# Altium PCB main.PcbDoc
Units mil, origin at the board's own origin, x right, y up, seen from the top; angles counter-clockwise.
Board outline 6000 x 4000 mil, 2 copper layers (Top Layer, Bottom Layer); 11 components, 18 nets, 94 pads, 0 vias.
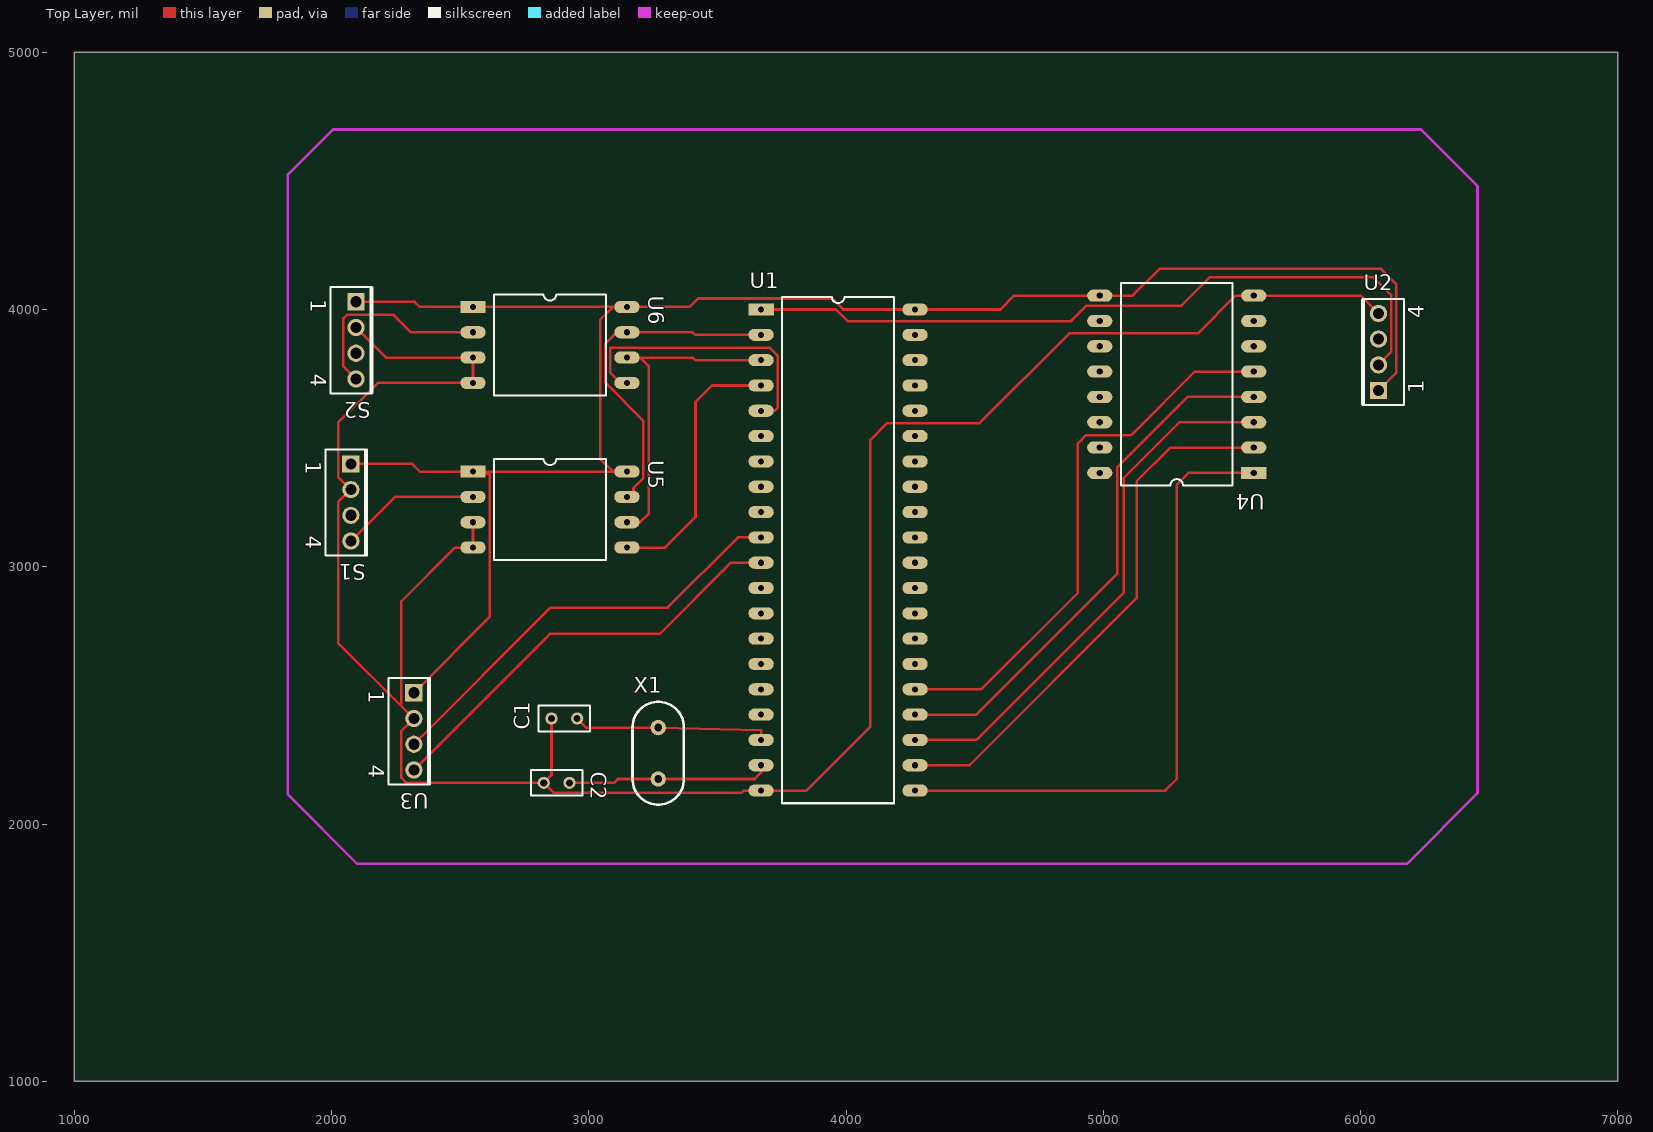
[diagram p0: Top Layer view]
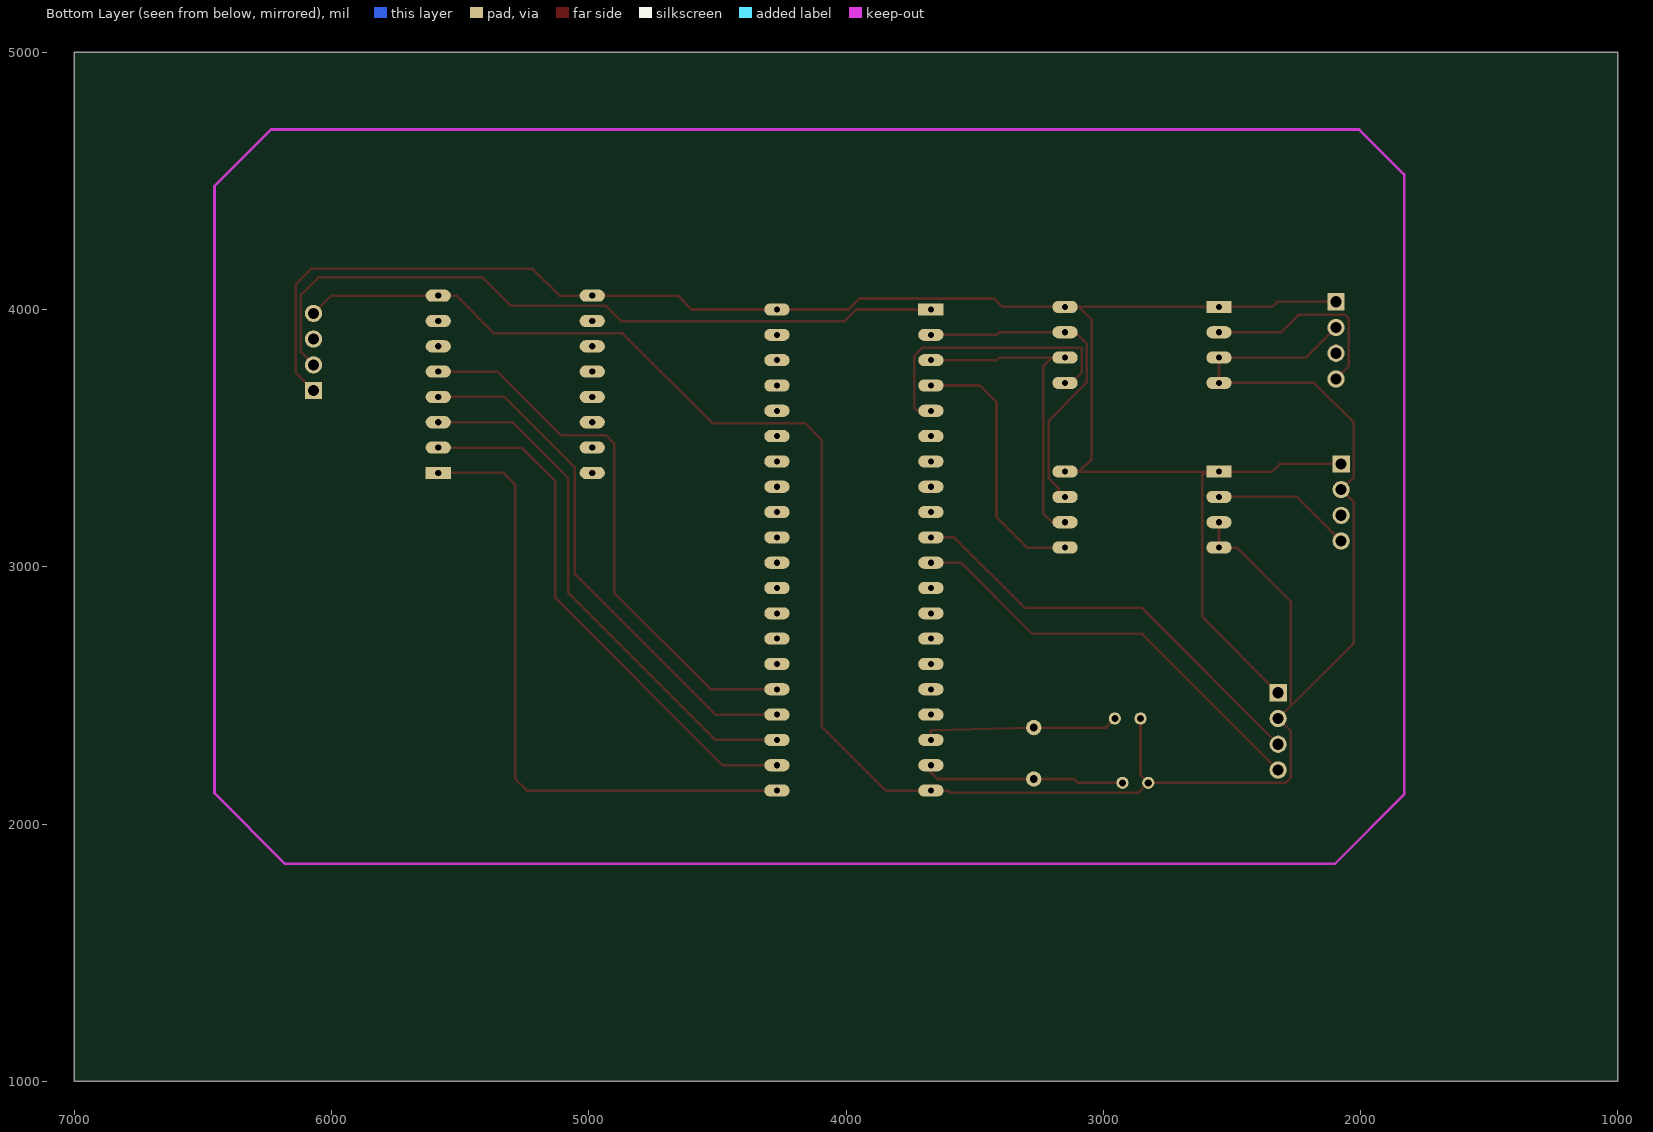
[diagram p1: Bottom Layer view, seen from below]

## Layer stack, top to bottom
Top Layer: signal copper 1.4
Dielectric: dielectric 12.6, FR-4, Dk 4.8
Bottom Layer: signal copper 1.4

## Board outline
1000,1000 7000,1000 7000,5000 1000,5000

## Design rules (kind name [scope] priority, off if disabled: settings)
Clearance [All] p1: gap=10
PolygonConnect [All] p1: connectstyle=Relief reliefconductorwidth=10 reliefentries=4 polygonreliefangle="90 Angle"
RoutingLayers [All] p1: top layer_v5=TRUE bottom layer_v5=FALSE
RoutingVias [All] p1: holewidth=28 width=50 viastyle="Through Hole" minholewidth=28 minwidth=50 maxholewidth=28 maxwidth=50
SilkscreenOverComponentPads [All] p1: minsilkscreentomaskgap=10
SolderMaskExpansion [All] p1: expansion=4
Width [All] p1: maxlimit=10 minlimit=10 preferedwidth=10
26 further rules are at their usual default settings.

## Components (designator, comment, footprint, x,y, rotation, side; value= is the part's Value field where it differs from the comment)
C1 "30pF" RAD-0.1 2905,2410 r180 top
C2 "30pF" RAD-0.1 2875,2160 r0 top
S1 "SIP4" P04A 2075,3250 r270 top
S2 "SIP4" P04A 2095,3880 r270 top
U1 "STC89C52" DIP40 3670,4000 r0 top
U2 "DHT11" P04A 6070,3835 r90 top
U3 "ESP8266 -01" P04A 2320,2360 r270 top
U4 "ULN2003" DIP16 5585,3365 r180 top
U5 "TLC1549" DIP8 2550,3370 r0 top
U6 "TLC1549" DIP8 2550,4010 r0 top
X1 "11.0592MHz" XTAL 3170,2175 r0 top

## Footprints (in the part's own frame and the unit in brackets; to place one, negate y for a bottom-side part, rotate by r counter-clockwise, add the part's x,y. Pads: shape width x height; smd on the part's side, far side on the other; paste and mask are expansions set on the pad)
DIP8 [mm]
  rect 2.5x1.2 hole 0.6: 1(0,0)
  oval 2.5x1.2 hole 0.6: 2(0,-2.5) 3(0,-5) 4(0,-7.5) 5(15.2,-7.5) 6(15.2,-5) 7(15.2,-2.5) 8(15.2,0)
  silkscreen extent 2.08,-8.75 13.11,1.25
DIP16 [mm]
  rect 2.5x1.2 hole 0.6: 1(0,0)
  oval 2.5x1.2 hole 0.6: 2(0,-2.5) 3(0,-5) 4(0,-7.5) 5(0,-10) 6(0,-12.5) 7(0,-15) 8(0,-17.5) 9(15.2,-17.5) 10(15.2,-15) 11(15.2,-12.5) 12(15.2,-10) 13(15.2,-7.5) 14(15.2,-5) 15(15.2,-2.5) 16(15.2,0)
  silkscreen extent 2.08,-18.75 13.11,1.25
DIP40 [mm]
  rect 2.5x1.2 hole 0.6: 1(0,0)
  oval 2.5x1.2 hole 0.6: 2(0,-2.5) 3(0,-5) 4(0,-7.5) 5(0,-10) 6(0,-12.5) 7(0,-15) 8(0,-17.5) 9(0,-20) 10(0,-22.5) 11(0,-25) 12(0,-27.5) 13(0,-30) 14(0,-32.5) 15(0,-35) 16(0,-37.5) 17(0,-40) 18(0,-42.5) 19(0,-45) 20(0,-47.5) 21(15.2,-47.5) 22(15.2,-45) 23(15.2,-42.5) 24(15.2,-40) 25(15.2,-37.5) 26(15.2,-35) 27(15.2,-32.5) 28(15.2,-30) 29(15.2,-27.5) 30(15.2,-25) 31(15.2,-22.5) 32(15.2,-20) 33(15.2,-17.5) 34(15.2,-15) 35(15.2,-12.5) 36(15.2,-10) 37(15.2,-7.5) 38(15.2,-5) 39(15.2,-2.5) 40(15.2,0)
  silkscreen extent 2.08,-48.75 13.11,1.25
P04A [mm] "TO, Thru-Hole, Vertical, Heatsink Mounted; 4 In-Line Leads; Pitch 2.54 mm"
  rect 1.7x1.7 hole 1.1: 1(-3.81,0)
  round 1.7 hole 1.1: 2(-1.27,0) 3(1.27,0) 4(3.81,0)
  silkscreen extent -5.25,-2.5 5.25,1.71
RAD-0.1 [mm] "Radial Cap, Thru-Hole; 2 Leads; 0.1 in Pin Spacin"
  round 1.2 hole 0.7: 1(-1.27,0) 2(1.27,0)
  silkscreen extent -2.54,-1.27 2.54,1.27
XTAL [mil]
  round 60 hole 30: 1(100,200) 2(100,0)
  silkscreen extent 0,-100 200,300

## Part data
C1 C2: library part CAP
U1: library part 89C5
X1: library part CRYSTA

## Nets (pads, with @x,y where several pads share a name; then routed paths per layer and width w, separated by ;. In a path a pad name is that pad's centre, name@x,y a point inside that pad or via, vN(x,y) a via of type N, cw(c..) or ccw(c..) an arc to the next point about the centre after c; other vN are vias at no path point)
GND: C1.2 C2.1 S1.2 S2.2 U1.20 U2.4 U3.2 U4.8 U5.3 U5.4 U6.3 U6.4 | length 9191
  Top Layer w10: S2.2 2211.85,3813.15 U6.3 U6.4 2180.72,3714.72 2026,3560 2026,3349 S1.2 2026,3251 2026,2704 2271,2459 ; U5.3 U5.4 2480,3074.72 2271,2865.72 2271,2459 ; C1.2 2855,2190 C2.1 ; U2.4 6001.02,4053.98 U4.8 5514.98,4053.98 5368,3907 4868,3907 4519,3558 4160,3558 4095,3493 4095,2378.92 3846,2129.92 U1.20 3602.92,2129.92 3594,2121 2864,2121 C2.1 ; 2271,2459 U3.2 2271,2361 2271,2180 2291,2160 C2.1
NetC1_1: C1.1 U1.18 X1.1 | length 767.9
  Top Layer w10: C1.1 2990,2375 X1.1 3670,2365 U1.18
NetC2_2: C2.2 U1.19 X1.2 | length 789.9
  Top Layer w10: C2.2 3098,2160 3113,2175 X1.2 3645,2175 3670,2200 U1.19
NetS1_4: S1.4 U5.2 | length 546.1
  Top Layer w10: S1.4 2246.57,3271.57 U5.2
NetS2_4: S2.4 U6.2 | length 793
  Top Layer w10: S2.4 2046,3779 2046,3965 2060,3979 2241,3979 2308.43,3911.57 U6.2
NetU1_1: U1.1 U2.2 | length 2858.5
  Top Layer w10: U1.1 3961,4000 4006,3955 4875,3955 4935,4015 5304,4015 5414,4125 6051,4125 6119,4057 6119,3834 U2.2
NetU1_2: U1.2 U5.7 U6.7 | length 1327.3
  Top Layer w10: U5.7 3174,3271.57 3174,3306 3212.64,3344.64 3212.64,3567.36 3064.21,3715.79 3064.21,3867.79 3108,3911.57 U6.7 3404,3911.57 3414,3901.57 U1.2
NetU1_3: U1.3 U5.6 U6.6 | length 1244.3
  Top Layer w10: U5.6 3200,3173.15 3232.64,3205.79 3232.64,3780.51 3200,3813.15 ; U6.6 3200,3813.15 ; U1.3 3414,3803.15 3404,3813.15 3200,3813.15
NetU1_4: U1.4 U5.5 | length 1044.5
  Top Layer w10: U5.5 3297,3074.72 3415,3192.72 3415,3640 3479.72,3704.72 U1.4
NetU1_5: U1.5 U6.5 | length 1112.9
  Top Layer w10: U6.5 3123,3714.72 3084.21,3753.51 3084.21,3851 3085.21,3852 3703,3852 3735,3820 3735,3620 3721.3,3606.3 U1.5
NetU1_10: U1.10 U3.3 | length 1683.1
  Top Layer w10: U3.3 2851,2841 3306.83,2841 3580,3114.17 U1.10
NetU1_11: U1.11 U3.4 | length 1683.8
  Top Layer w10: U3.4 2849,2739 3276,2739 3552.75,3015.75 U1.11
NetU1_21: U1.21 U4.1 | length 2498.3
  Top Layer w10: U1.21 5240,2129.92 5286,2175.92 5286,3320 5331,3365 U4.1
NetU1_22: U1.22 U4.2 | length 2094.4
  Top Layer w10: U1.22 4480.35,2228.35 5130,2878 5130,3332.43 5261,3463.43 U4.2
NetU1_23: U1.23 U4.3 | length 2089.6
  Top Layer w10: U1.23 4507,2326.77 5080,2899.77 5080,3346 5295.85,3561.85 U4.3
NetU1_24: U1.24 U4.4 | length 2070.6
  Top Layer w10: U1.24 4507,2425.2 5055,2973.2 5055,3387 5328.28,3660.28 U4.4
NetU1_25: U1.25 U4.5 | length 2168.5
  Top Layer w10: U1.25 4525.62,2523.62 4901,2899 4901,3480 4933,3512 5109,3512 5355.7,3758.7 U4.5
VCC: S1.1 S2.1 U1.40 U2.1 U3.1 U4.9 U5.1 U5.8 U6.1 U6.8 | length 7421.3
  Top Layer w10: S1.1 2313,3400 2343,3370 U5.1 ; S2.1 2323,4030 2343,4010 U6.1 3094,4010 ; U3.1 2615,2805 2615,3360 U5.1 ; U5.8 3094,3370 ; U2.1 6139,3754 6139,4099 6080,4158 5218.02,4158 5114,4053.98 U4.9 4653.98,4053.98 4600,4000 U1.40 3990,4000 3947,4043 3425,4043 3392,4010 U6.8 3094,4010 ; U5.1 3094,3370 ; 3094,3370 3044.21,3419.79 3044.21,3960.21 3094,4010
pads on no net: S1.3 S2.3 U1.6 U1.7 U1.8 U1.9 U1.12 U1.13 U1.14 U1.15 U1.16 U1.17 U1.26 U1.27 U1.28 U1.29 U1.30 U1.31 U1.32 U1.33 U1.34 U1.35 U1.36 U1.37 U1.38 U1.39 U2.3 U4.6 U4.7 U4.10 U4.11 U4.12 U4.13 U4.14 U4.15 U4.16

## Keep-outs
Keep-Out Layer:
  lines w10: 1830,2115 2100,1845 6180,1845 6455,2120 6455,4480 6235,4700 2005,4700 1830,4525 1830,2115

## Text inside footprints (layer, text, board x,y; h text height)
S1: Top Overlay "1" at 1898.82,3409.84 h59.06 r270; Top Overlay "4" at 1898.82,3119.68 h59.06 r270
S2: Top Overlay "1" at 1918.82,4039.84 h59.06 r270; Top Overlay "4" at 1918.82,3749.68 h59.06 r270
U2: Top Overlay "1" at 6246.18,3675.16 h59.06 r90; Top Overlay "4" at 6246.18,3965.32 h59.06 r90
U3: Top Overlay "1" at 2143.82,2519.84 h59.06 r270; Top Overlay "4" at 2143.82,2229.68 h59.06 r270